# Altium PCB PCB_sim800.PcbDoc
Units mil, origin at the board's own origin, x right, y up, seen from the top; angles counter-clockwise.
Board outline 3385.83 x 2204.72 mil, 2 copper layers (Top Layer, Bottom Layer), stack 61.2 mil thick; 112 components, 1 nets, 371 pads, 55 vias.
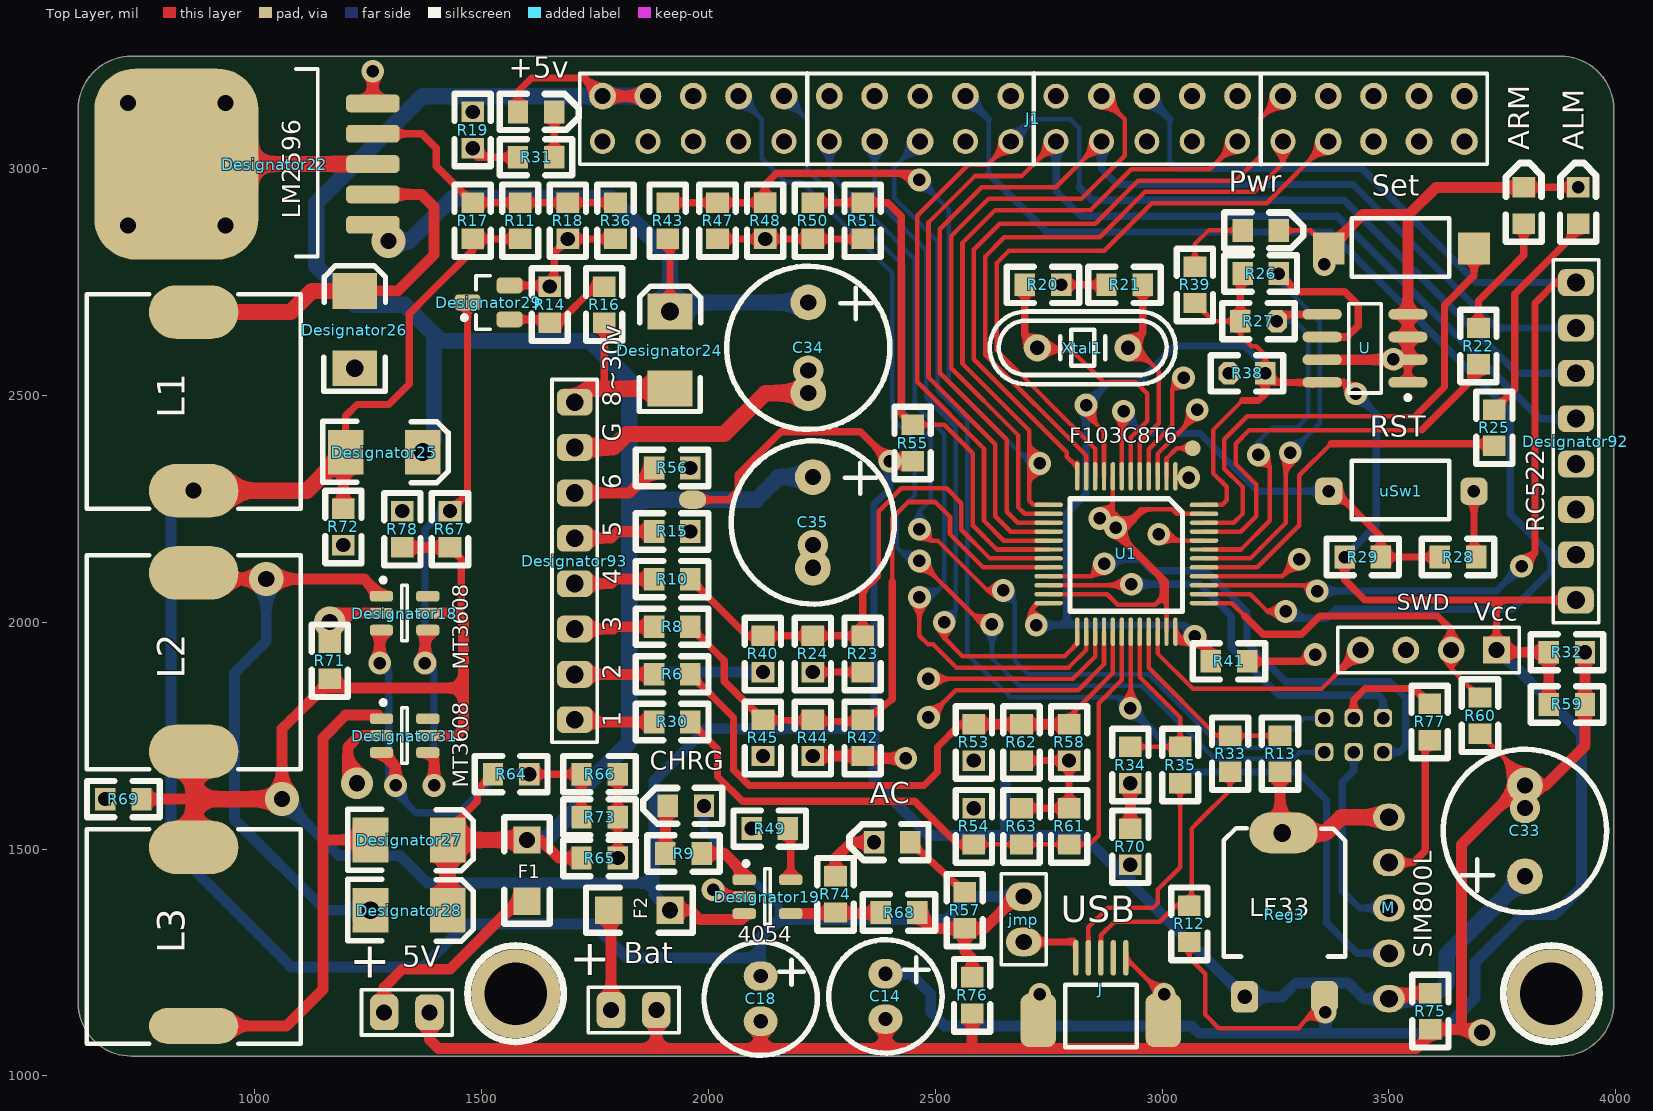
[diagram p0: Top Layer view]
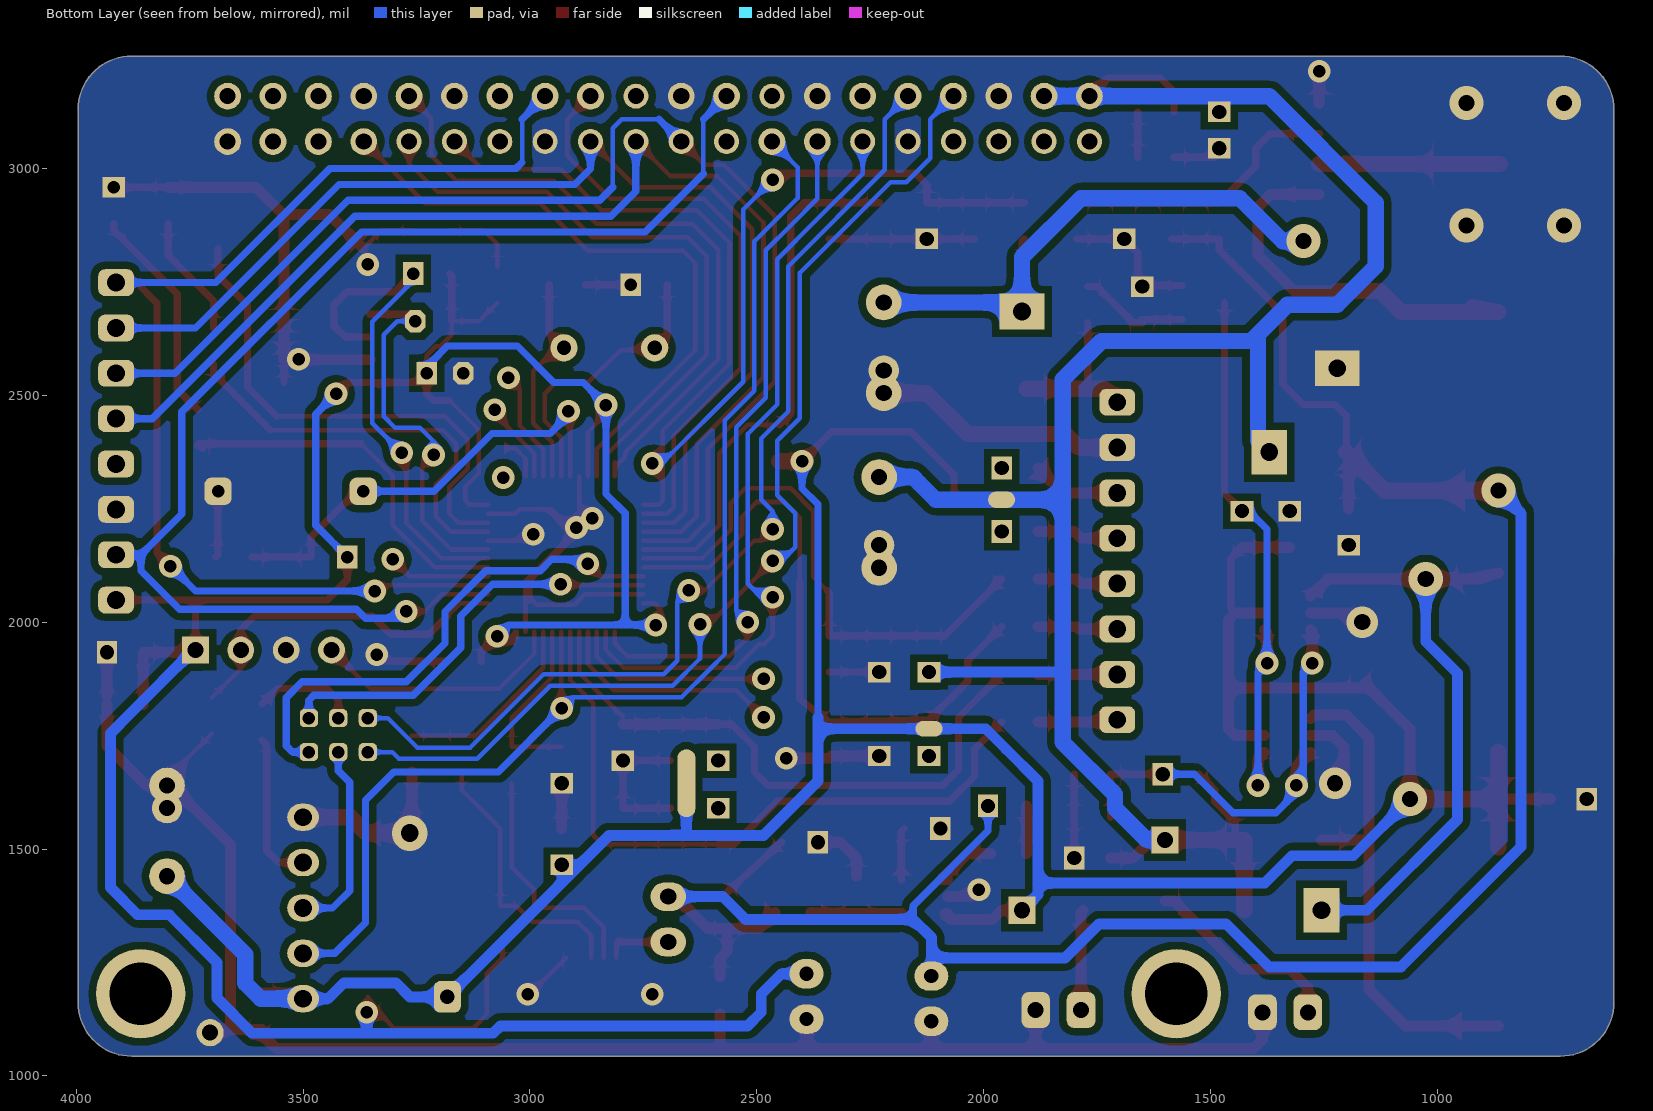
[diagram p1: Bottom Layer view, seen from below]

## Layer stack, top to bottom
Top Solder: solder mask 0.8, Solder Resist, Dk 3.5
Top Layer: signal copper 2.1
Dielectric 1: dielectric 57, FR-4, Dk 4.6
Bottom Layer: signal copper 2.1
Bottom Solder: solder mask 0.8, Solder Resist, Dk 3.5

## Board outline
728.35,1043.31 cw(c728.35,1161.42) 610.24,1161.42 610.24,3129.92 cw(c728.35,3129.92) 728.35,3248.03 3877.95,3248.03 cw(c3877.95,3129.92) 3996.06,3129.92 3996.06,1161.42 cw(c3877.95,1161.42) 3877.95,1043.31

## Design rules (kind name [scope] priority, off if disabled: settings)
Clearance [All] p1: gap=16 except(8: Track-SMDPad Track-Track SMDPad-SMDPad)
PlaneClearance [InNet('GND')] p1: clearance=20
PolygonConnect [All] p1: connectstyle=Direct reliefconductorwidth=20 reliefentries=4 polygonreliefangle="90 Angle" airgapwidth=20
RoutingVias [All] p1: holewidth=28 width=50 viastyle="Through Hole" minholewidth=28 minwidth=50 maxholewidth=28 maxwidth=50
SilkToSolderMaskClearance [IsPad] p1: minsilkscreentomaskgap=0 clearancetoexposedcopper=TRUE
SolderMaskExpansion [All] p1: expansion=4
UnRoutedNet [All] p1 off:
UnpouredPolygon [All] p1 off: allowunpoured=FALSE
Width [All] p1: maxlimit=36 minlimit=10 preferedwidth=10
26 further rules are at their usual default settings.

## Classes and differential pairs
component class "RPI 3": jmp R2

## Components (designator, comment, footprint, x,y, rotation, side; value= is the part's Value field where it differs from the comment)
5V "+" HDR1X2#1 1385,1140 r180 top
+5v "Comment" LED805#1 1580,3125 r0 top
AC "Comment" LED805#2 2445,1515 r180 top
ALM "Comment" LED805#3 3917.4,2878.7 r90 top
ARM "Comment" LED805#1 3797.4,2878.7 r90 top
Bat "+" HDR1X2#1 1885,1145 r180 top
C14 "Comment" CAP_1.0 2390,1175 r270 top
C18 "Comment" CAP_1.0 2115,1170 r270 top
C33 "470uF/50v" Cap_big 3800,1440 r90 top
C34 "470uF/50v" Cap_big 2220,2705 r270 top
C35 "470uF/50v" Cap_big 2230,2320 r270 top
CHRG "Comment" LED805#4 1990,1595 r180 top
Designator18 "MT3608" SOT23-6_M#1 1330,2020 r0 top
Designator19 "4054" SOT23-6_M#2 2130,1395 r0 top
Designator22 "LM2596" D2PAK 1260,3010 r90 top
Designator23 "Comment" Diode_smd_wide#1 880,3335 r0 top
Designator24 "Comment" Diode_smd_wide#2 1915,2515 r0 top
Designator25 "Comment" Diode_smd_wide#2 1200,2375 r270 top
Designator26 "Comment" Diode_smd_wide#3 1220,2560 r0 top
Designator27 "Comment" Diode_smd_wide#4 1255,1520 r270 top
Designator28 "Comment" Diode_smd_wide#3 1255,1365 r270 top
Designator29 "Comment" SOT23_M 1515,2705 r180 top
Designator31 "MT3608" SOT23-6_M#1 1330,1750 r0 top
Designator92 "RC522" HDR1X8#1 3912.4,2048.7 r90 top
Designator93 "RC522" HDR1X8#2 1705,1785 r90 top
F1 "Fuse" 1206 1600,1385 r90 top
F2 "Fuse" 1206 1780,1365 r0 top
J "USB" Micro_USB 2865,1260 r90 top
J1 "RasPi" HDR2X20 1766.4,3059.7 r0 top
jmp "Comment" HDR1X2#2 2695,1295 r90 top
L1 "Comment" L_Power_smd#1 865,2290 r90 top
L2 "Comment" L_Power_smd#1 865,1715 r90 top
L3 "Comment" L_Power_smd#2 865,1110 r90 top
M "SIM800L" SIM800L 3500,1570 r180 top
OUT "Comment" HDR1X3 -310.39,2261.81 r90 top
Pwr "Comment" LED805#1 3177.4,2863.7 r0 top
R6 "Comment" SMD0805#1 1880,1885 r0 top
R8 "Comment" SMD0805#1 1880,1990 r0 top
R9 "Comment" SMD0805#1 1905,1490 r0 top
R10 "Comment" SMD0805#1 1880,2095 r0 top
R11 "Comment" SMD0805#1 1585,2925 r270 top
R12 "Comment" SMD0805#1 3060,1375 r270 top
R13 "Comment" SMD0805#1 3260,1670 r90 top
R14 "Comment" SMD0805#2 1650,2660 r90 top
R15 "Comment" SMD0805#3 1960,2200 r180 top
R16 "Comment" SMD0805#1 1770,2660 r90 top
R17 "Comment" SMD0805#1 1480,2845 r90 top
R18 "Comment" SMD0805#3 1690,2845 r90 top
R19 "Comment" SMD0805#4 1480,3045 r90 top
R20 "Comment" SMD0805#5 2697.4,2743.7 r0 top
R21 "Comment" SMD0805#1 2877.4,2743.7 r0 top
R22 "Comment" SMD0805#1 3697.4,2568.7 r90 top
R23 "Comment" SMD0805#1 2340,1970 r270 top
R24 "Comment" SMD0805#2 2230,1970 r270 top
R25 "Comment" SMD0805#1 3732.4,2388.7 r90 top
R26 "Comment" SMD0805#6 3257.4,2768.7 r180 top
R27 "Comment" SMD0805#7 3252.4,2663.7 r180 top
R28 "Comment" SMD0805#1 3692.4,2143.7 r180 top
R29 "Comment" SMD0805#5 3482.4,2143.7 r180 top
R30 "Comment" SMD0805#1 1960,1780 r180 top
R31 "Comment" SMD0805#1 1580,3025 r0 top
R32 "Comment" SMD0805#2 3852.4,1933.7 r0 top
R33 "Comment" SMD0805#1 3150,1670 r90 top
R34 "Comment" SMD0805#2 2930,1725 r270 top
R35 "Comment" SMD0805#1 3040,1645 r90 top
R36 "Comment" SMD0805#1 1795,2925 r270 top
R38 "Comment" SMD0805#8 3147.4,2548.7 r0 top
R39 "Comment" SMD0805#1 3072.4,2703.7 r90 top
R40 "Comment" SMD0805#2 2120,1970 r270 top
R41 "Comment" SMD0805#1 3107.4,1913.7 r0 top
R42 "Comment" SMD0805#1 2340,1785 r270 top
R43 "Comment" SMD0805#1 1910,2845 r90 top
R44 "Comment" SMD0805#2 2230,1785 r270 top
R45 "Comment" SMD0805#2 2120,1785 r270 top
R47 "Comment" SMD0805#1 2020,2845 r90 top
R48 "Comment" SMD0805#3 2125,2845 r90 top
R49 "Comment" SMD0805#2 2175,1545 r180 top
R50 "Comment" SMD0805#1 2230,2845 r90 top
R51 "Comment" SMD0805#1 2340,2845 r90 top
R53 "Comment" SMD0805#2 2585,1775 r270 top
R54 "Comment" SMD0805#3 2585,1590 r270 top
R55 "Comment" SMD0805#1 2450,2435 r270 top
R56 "Comment" SMD0805#3 1960,2340 r180 top
R57 "Comment" SMD0805#1 2565,1325 r90 top
R58 "Comment" SMD0805#3 2795,1695 r90 top
R59 "Comment" SMD0805#1 3852.4,1818.7 r0 top
R60 "Comment" SMD0805#1 3700.98,1753.98 r90 top
R61 "Comment" SMD0805#1 2795,1510 r90 top
R62 "Comment" SMD0805#1 2690,1695 r90 top
R63 "Comment" SMD0805#1 2690,1510 r90 top
R64 "Comment" SMD0805#2 1525,1665 r0 top
R65 "Comment" SMD0805#3 1800,1480 r180 top
R66 "Comment" SMD0805#1 1800,1665 r180 top
R67 "Comment" SMD0805#3 1430,2245 r270 top
R68 "Comment" SMD0805#1 2460,1360 r180 top
R69 "Comment" SMD0805#3 670,1610 r0 top
R70 "Comment" SMD0805#3 2930,1465 r90 top
R71 "Comment" SMD0805#1 1165,1955 r270 top
R72 "Comment" SMD0805#3 1195,2170 r90 top
R73 "Comment" SMD0805#1 1800,1570 r180 top
R74 "Comment" SMD0805#1 2280,1440 r270 top
R75 "Comment" SMD0805#1 3591.3,1102.4 r90 top
R76 "Comment" SMD0805#1 2581.3,1137.4 r90 top
R77 "Comment" SMD0805#1 3590,1820 r270 top
R78 "Comment" SMD0805#3 1325,2245 r270 top
Reg3 "LF33" DPAK 3270,1545 r0 top
Set "Comment" MicroSW_smd#1 3367.4,2823.7 r0 top
SWD "Comment" HDR1X4 3737.4,1938.7 r180 top
U "24C01" SO8_N 3447.4,2603.7 r180 top
U1 "F103C8T6" STM32F103C8T6_LQFP48 3092.4,2258.7 r180 top
uSw1 "RST" MicroSW_smd#2 3367.4,2288.7 r0 top
Xtal1 "Comment" XTAL2 2875,2665 r180 top

## Footprints (in the part's own frame and the unit in brackets; to place one, negate y for a bottom-side part, rotate by r counter-clockwise, add the part's x,y. Pads: shape width x height; smd on the part's side, far side on the other; paste and mask are expansions set on the pad)
1206 [mil]
  rect 60x60 smd: 1(0,0)
  rect 60x60 hole 35.43: 2(135,0)
  silkscreen extent -50,-50 185,50
CAP_1.0 [mil]
  oval 65x75 hole 31.5: 2(-50,0) 3(50,0)
  silkscreen extent -125,-125 125,125
Cap_big [mm]
  round 2 hole 0.9: 1(5.08,0) 2(0,0)
  silkscreen extent -2.03,-4.57 7.11,4.57
D2PAK [mm]
  rrect50% 10.7x9.2 smd: 2(0,11)
  rrect50% 1x3 smd: En_(3.4,0) FB(1.7,0) Gnd(0,0) In(-3.4,0) Out(-1.7,0)
  silkscreen extent -5.17,3.08 5.33,4.33
Diode_smd_wide#1 [mm]
  rect 2.5x2 smd: 1(-1265.9,-1266.943) 2(-1265.9,-1262.625)
  silkscreen extent -1267.63,-1268.22 -1264.18,-1261.2
Diode_smd_wide#2 [mm]
  rect 2.5x2 smd: 1(0,0)
  rect 2.5x2 hole 1: 2(0,4.318)
  silkscreen extent -1.73,-1.28 1.73,5.74
Diode_smd_wide#3 [mm]
  rect 2.5x2 hole 1: 1(0,0)
  rect 2.5x2 smd: 2(0,4.318)
  silkscreen extent -1.73,-1.28 1.73,5.74
Diode_smd_wide#4 [mm]
  rect 2.5x2 smd: 1(0,0) 2(0,4.318)
  silkscreen extent -1.73,-1.28 1.73,5.74
DPAK [mil]
  oval 150x90 smd: 0(-2.2,-9.65)
  rrect50% 60x70 hole 31.5: In(-88,-371)
  rrect50% 60x70 smd: Out(88,-371)
  silkscreen extent -134,-282 134,1
HDR1X2#1 [mm] "Connector; Header; 2 Position"
  rrect50% 1.6x2 hole 0.9: 1(0,0) 2(2.54,0)
  silkscreen extent -1.27,-1.27 3.81,1.27
HDR1X2#2 [mm] "Connector; Header; 2 Position"
  oval 1.6x2 hole 0.9: 1(0,0) 2(2.54,0)
  silkscreen extent -1.27,-1.27 3.81,1.27
HDR1X3 [mm] "Connector; Header; 3 Position"
  rrect50% 1.5x2.5 hole 1: 1(0,0) 2(2.54,0) 3(5.08,0)
  silkscreen extent -1.27,-1.27 6.35,1.27
HDR1X4 [mm] "Connector; Header; 4 Position"
  round 1.5 hole 0.9: GND(5.08,0) SWCLK(2.54,0) SWDIO(7.62,0)
  rect 1.5x1.5 hole 0.9: VDD(0,0)
  silkscreen extent -1.27,-1.27 8.89,1.27
HDR1X8#1 [mm] "Connector; Header; 8 Position"
  rrect50% 1.5x2 hole 1: CS(17.78,0) Gnd(5.08,0) IRQ(7.62,0) MISO(10.16,0) MOSI(12.7,0) RST(2.54,0) SCK(15.24,0) Vcc3.3V(0,0)
  silkscreen extent -1.27,-1.27 19.05,1.27
HDR1X8#2 [mm] "Connector; Header; 8 Position"
  rrect50% 1.5x2 hole 1: +12V(17.78,0) Gnd(15.24,0) IO(0,0) IO(2.54,0) IO(5.08,0) IO(7.62,0) IO(10.16,0) IO(12.7,0)
  silkscreen extent -1.27,-1.27 19.05,1.27
HDR2X20 [mm] "Connector; Header; 20x2 Position"
  round 1.4 hole 0.9: 3.3v(0,0) 3.3v(20.32,0) Gnd(10.16,0) Gnd(30.48,0) GPIO2-SDA(2.54,0) GPIO3-SCL(5.08,0) GPIO4(7.62,0) GPIO5(35.56,0) GPIO6(38.1,0) GPIO9-MISO(25.4,0) GPIO10-MOSI(22.86,0) GPIO11-SCLK(27.94,0) GPIO17(12.7,0) GPIO23(17.78,2.54) GPIO25(25.4,2.54) ID_SD(33.02,0)
  round 1.5 hole 0.9: 5v(0,2.54) 5v(2.54,2.54) Gnd(5.08,2.54) Gnd(15.24,2.54) Gnd(22.86,2.54) Gnd(35.56,2.54) GND(40.64,2.54) Gnd(48.26,0) GPIO7-CE1(30.48,2.54) GPIO8-CE0(27.94,2.54) GPIO12(38.1,2.54) GPIO13(40.64,0) GPIO14-TX(7.62,2.54) GPIO15-RX(10.16,2.54) GPIO16-CE0(43.18,2.54) GPIO18(12.7,2.54) GPIO19-MISO(43.18,0) GPIO20-MOSI(45.72,2.54) GPIO21-SCLK(48.26,2.54) GPIO22(17.78,0) GPIO24(20.32,2.54) GPIO26(45.72,0) GPIO27(15.24,0) ID_SC(33.02,2.54)
  silkscreen extent -1.27,-1.27 49.53,3.81
L_Power_smd#1 [mm]
  oval 3x5 smd: 0(0,0) 0(10,0)
  silkscreen extent -1,-6 11,6
L_Power_smd#2 [mm]
  oval 2x5 smd: 0(0,0)
  oval 3x5 smd: 0(10,0)
  silkscreen extent -1,-6 11,6
LED805#1 [mil]
  rect 45x50 smd: 0(0,0) 0(80,0)
  silkscreen extent -40,-40 134,40
LED805#2 [mil]
  rect 45x50 smd: 0(0,0)
  rect 45x50 hole 31.5: 0(80,0)
  silkscreen extent -40,-40 134,40
LED805#3 [mil]
  rect 45x50 smd: 0(0,0)
  rect 45x50 hole 27.56: 0(80,0)
  silkscreen extent -40,-40 134,40
LED805#4 [mil]
  rect 45x50 hole 31.5: 0(0,0)
  rect 45x50 smd: 0(80,0)
  silkscreen extent -40,-40 134,40
Micro_USB [mm]
  rrect50% 3x2 smd: 1(-3.5,-3.5) 1(-3.5,3.5)
  oval 2x0.3 smd: D+(0,0) D-(0,0.7) Gnd(0,-1.4) ID(0,-0.7) Vcc(0,1.4)
  silkscreen extent -5,-2 -1.5,2
MicroSW_smd#1 [mil]
  rect 70x70 smd: 1(0,0) 2(320,0)
  silkscreen extent 51,-62 266,67
MicroSW_smd#2 [mil]
  rrect50% 60x60 hole 27.56: 1(0,0) 2(320,0)
  silkscreen extent 51,-62 266,67
SIM800L [mil]
  oval 70x60 hole 39.37: Gnd(0,0) RST(0,300) RXD(0,200) TXD(0,100) Vcc(0,400)
SMD0805#1 [mil]
  rect 45x50 smd: 0(0,0) 0(80,0)
  silkscreen extent -40,-40 120,40
SMD0805#2 [mil]
  rect 45x50 smd: 0(0,0)
  rect 45x50 hole 31.5: 0(80,0)
  silkscreen extent -40,-40 120,40
SMD0805#3 [mil]
  rect 45x50 hole 31.5: 0(0,0)
  rect 45x50 smd: 0(80,0)
  silkscreen extent -40,-40 120,40
SMD0805#4 [mil]
  rect 45x50 hole 31.5: 0(0,0) 0(80,0)
  silkscreen extent -40,-40 120,40
SMD0805#5 [mil]
  rect 45x50 smd: 0(0,0)
  rect 45x50 hole 27.56: 0(80,0)
  silkscreen extent -40,-40 120,40
SMD0805#6 [mil]
  rect 45x50 hole 27.56: 0(0,0)
  rect 45x50 smd: 0(80,0)
  silkscreen extent -40,-40 120,40
SMD0805#7 [mil]
  oct 45x50 hole 27.56: 0(0,0)
  rect 45x50 smd: 0(80,0)
  silkscreen extent -40,-40 120,40
SMD0805#8 [mil]
  oct 45x50 hole 27.56: 0(0,0)
  rect 45x50 hole 27.56: 0(80,0)
  silkscreen extent -40,-40 120,40
SO8_N [mm] "SOIC, 8-Leads, Body 4.9x3.9mm, Pitch 1.27mm, IPC Medium Density"
  oval 2.2x0.6 smd: Gnd(-2.4,1.905) Gnd(-2.4,-0.635) Gnd(-2.4,0.635) Gnd(-2.4,-1.905) Gnd(2.4,0.635) SCL(2.4,-0.635) SDA(2.4,-1.905) Vcc(2.4,1.905)
  silkscreen extent -2.53,-2.5 0.9,2.88, body extent -2,-2.5 2,2.5, height 1.75
SOT23-6_M#1 [mm] "SOT23, 6-Leads, Body 2.9x1.6mm, Pitch 0.95mm, Lead Span 2.7mm, IPC Low Density"
  rrect50% 1.3x0.6 smd: En(1.3,-0.95) FB(-1.3,-0.95) Gnd(-1.3,0) In(1.3,0) NC(1.3,0.95) SW(-1.3,0.95)
  silkscreen extent -1.32,-1.55 0.15,1.97, body extent -0.9,-1.55 0.9,1.55, height 1.45
SOT23-6_M#2 [mm] "SOT23, 6-Leads, Body 2.9x1.6mm, Pitch 0.95mm, Lead Span 2.7mm, IPC Low Density"
  rrect50% 1.3x0.6 smd: Bat(-1.3,-0.95) CHRG(-1.3,0.95) Gnd(-1.3,0) Prog(1.3,0.95) Vcc(1.3,-0.95)
  silkscreen extent -1.32,-1.55 0.15,1.97, body extent -0.9,-1.55 0.9,1.55, height 1.45
SOT23_M [mm] "SOT23, 3-Leads, Body 2.9x1.3mm, Pitch 0.95mm, Lead Span 2.3mm - Reverse Pinning, IPC Low Density"
  rrect50% 1.45x0.9 smd: 1(1.175,0) 2(-1.175,-0.95) 3(-1.175,0.95)
  silkscreen extent -0.1,-1.5 1.47,1.5, body extent -0.7,-1.5 0.7,1.5, height 1.1
STM32F103C8T6_LQFP48 [mm]
  oval 1.6x0.25 smd: BOOT0(0,2) PA3-RX2(8.7,0) PA4-NSS1(8.7,0.5) PA5-SCK1(8.7,1) PA6-MISO1(8.7,1.5) PA7-MOSI1(8.7,2) PA14-JTCK-SWDCLK(0,5.5) PA15-JTDI(0,5) PB0(8.7,2.5) PB1(8.7,3) PB2(8.7,3.5) PB3-TDO(0,4.5) PB4-JTRST(0,4) PB5(0,3.5) PB6-SCL1(0,3) PB7-SDA1(0,2.5) PB8(0,1.5) PB9(0,1) PB10-TX3-SCL2(8.7,4) PB11-RX3-SDA2(8.7,4.5) VDD_1(8.7,5.5) VDD_3(0,0) VSS_1(8.7,5) VSS_3(0,0.5)
  oval 0.25x1.6 smd: NRST(4.6,-1.6) PA0-WKUP(6.1,-1.6) PA1(6.6,-1.6) PA2-TX2(7.1,-1.6) PA8(5.1,7.1) PA9-TX1-FT(4.6,7.1) PA10-RX1-FT(4.1,7.1) PA11-UsbDM(3.6,7.1) PA12-UsbDP(3.1,7.1) PA13-TMS-SWDIO(2.6,7.1) PB12-NSS2(7.1,7.1) PB13-SCK2(6.6,7.1) PB14-MISO2(6.1,7.1) PB15-MOSI2(5.6,7.1) Pc13-Tamper-RTC(2.1,-1.6) PC14-OSC32_IN(2.6,-1.6) PC15-OSC32_OUT(3.1,-1.6) PD0-OSC_IN(3.6,-1.6) PD1-OSC_OUT(4.1,-1.6) VBAT(1.6,-1.6) VDD_2(1.6,7.1) VDDA(5.6,-1.6) VSS_2(2.1,7.1) VSSA(5.1,-1.6)
  silkscreen extent 1.2,-0.35 7.5,5.95
XTAL2 [mil]
  round 60 hole 31.5: 1(-50,60) 2(150,60)
  silkscreen extent -155,-20 255,140

## Part data
OUT: library part "Header 3"

## Free pads (board coordinates)
  oval 60x40 smd: 0(1965,2270)
  round 35 smd: 0(3067.4,2383.7)
  rrect50% 40x40 hole 27.56: 0(3357.4,1713.7) 0(3357.4,1788.7) 0(3422.4,1713.7) 0(3422.4,1788.7) 0(3487.4,1713.7) 0(3487.4,1788.7)
  round 60 hole 35.43: 0(3705,1095)
  oval 60x36 smd far side: 1(1960,2270)
  round 66.93 hole 35.43: 1(2230,2170) 2(2220,2555) 3(3800,1590)
  oval 60x35 smd far side: 2(2120,1765)
  oval 40x150 smd far side: 3(2655,1645)
  round 196.85 hole 137.8: ""(1574.8,1181.1) ""(3858.27,1181.1)

## Via types
v1: diameter 50, hole 27.56, Top Layer to Bottom Layer, 44 vias
v2: diameter 75, hole 35.43, Top Layer to Bottom Layer, 8 vias
v3: diameter 70, hole 35.43, Top Layer to Bottom Layer, 2 vias
v4: diameter 78.74, hole 39.37, Top Layer to Bottom Layer, 1 vias

## Nets (pads, with @x,y where several pads share a name; then routed paths per layer and width w, separated by ;. In a path a pad name is that pad's centre, name@x,y a point inside that pad or via, vN(x,y) a via of type N, cw(c..) or ccw(c..) an arc to the next point about the centre after c; other vN are vias at no path point)
GND: 5V.1 AC.0@2365,1515 ALM.0@3917.4,2958.7 Bat.1 C14.3 C18.3 C33.1 C34.1 C35.1 Designator26.1 Designator92.Gnd Designator93.Gnd J1.Gnd J1.GND M.Gnd pad.0@3705,1095 pad.1@2230,2170 pad.2@2220,2555 pad.3@3800,1590 R14.0@1650,2740 R18.0@1690,2845 R19.0@1480,3045 R20.0@2777.4,2743.7 R21.0@2877.4,2743.7 R24.0@2230,1890 R32.0@3932.4,1933.7 R34.0@2930,1645 R38.0@3147.4,2548.7 R44.0@2230,1705 R48.0@2125,2845 R49.0@2095,1545 R58.0@2795,1695 R65.0@1800,1480 R69.0@670,1610 R71.0@1165,1955 R72.0@1195,2170 R78.0@1325,2245 SWD.GND uSw1.2 | length 290
  Top Layer w16: R20.0@2792.4,2743.7 R21.0@2877.4,2743.7 ; 2795,1590 R58.0@2795,1695
  Top Layer w24: 2930,1545 R34.0@2930,1645
  other v1: 2730,1180 3005,1180 2010,1410 2435,1700 3337.4,1928.7 2992.4,2193.7 2897.4,2208.7 2862.4,2228.7 3510,2580 3357.4,2788.7 1260,3215
  other v2: 720,2875 935,2875 720,3145 935,3145
  other v3: 1225,1645 1165,2000
  other v4: 3265,1535
pads on no net: 5V.2 +5v.0 AC.0@2445,1515 ALM.0@3917.4,2878.7 ARM.0 Bat.2 C14.2 C18.2 C33.2 C34.2 C35.2 CHRG.0 Designator18.En Designator18.FB Designator18.Gnd Designator18.In Designator18.NC Designator18.SW Designator19.Bat Designator19.CHRG Designator19.Gnd Designator19.Prog Designator19.Vcc Designator22.2 Designator22.En_ Designator22.FB Designator22.Gnd Designator22.In Designator22.Out Designator23.1 Designator23.2 Designator24.1 Designator24.2 Designator25.1 Designator25.2 Designator26.2 Designator27.1 Designator27.2 Designator28.1 Designator28.2 Designator29.1 Designator29.2 Designator29.3 Designator31.En Designator31.FB Designator31.Gnd Designator31.In Designator31.NC Designator31.SW Designator92.CS Designator92.IRQ Designator92.MISO Designator92.MOSI Designator92.RST Designator92.SCK Designator92.Vcc3.3V Designator93.+12V Designator93.IO F1.1 F1.2 F2.1 F2.2 J1.3.3v J1.5v J1.GPIO2-SDA J1.GPIO3-SCL J1.GPIO4 J1.GPIO5 J1.GPIO6 J1.GPIO7-CE1 J1.GPIO8-CE0 J1.GPIO9-MISO J1.GPIO10-MOSI J1.GPIO11-SCLK J1.GPIO12 J1.GPIO13 J1.GPIO14-TX J1.GPIO15-RX J1.GPIO16-CE0 J1.GPIO17 J1.GPIO18 J1.GPIO19-MISO J1.GPIO20-MOSI J1.GPIO21-SCLK J1.GPIO22 J1.GPIO23 J1.GPIO24 J1.GPIO25 J1.GPIO26 J1.GPIO27 J1.ID_SC J1.ID_SD J.1 J.D+ J.D- J.Gnd J.ID J.Vcc jmp.1 jmp.2 L1.0 L2.0 L3.0 M.RST M.RXD M.TXD M.Vcc OUT.1 OUT.2 OUT.3 Pwr.0 R6.0 R8.0 R9.0 R10.0 R11.0 R12.0 R13.0 R14.0@1650,2660 R15.0 R16.0 R17.0 R18.0@1690,2925 R19.0@1480,3125 R20.0@2697.4,2743.7 R21.0@2957.4,2743.7 R22.0 R23.0 R24.0@2230,1970 R25.0 R26.0 R27.0 R28.0 R29.0 R30.0 R31.0 R32.0@3852.4,1933.7 R33.0 R34.0@2930,1725 R35.0 R36.0 R38.0@3227.4,2548.7 R39.0 R40.0 R41.0 R42.0 R43.0 R44.0@2230,1785 R45.0 R47.0 R48.0@2125,2925 R49.0@2175,1545 R50.0 R51.0 R53.0 R54.0 R55.0 R56.0 R57.0 R58.0@2795,1775 R59.0 R60.0 R61.0 R62.0 R63.0 R64.0 R65.0@1720,1480 R66.0 R67.0 R68.0 R69.0@750,1610 R70.0 R71.0@1165,1875 R72.0@1195,2250 R73.0 R74.0 R75.0 R76.0 R77.0 R78.0@1325,2165 Reg3.0 Reg3.In Reg3.Out Set.1 Set.2 SWD.SWCLK SWD.SWDIO SWD.VDD U1.BOOT0 U1.NRST U1.PA0-WKUP U1.PA1 U1.PA2-TX2 U1.PA3-RX2 U1.PA4-NSS1 U1.PA5-SCK1 U1.PA6-MISO1 U1.PA7-MOSI1 U1.PA8 U1.PA9-TX1-FT U1.PA10-RX1-FT U1.PA11-UsbDM U1.PA12-UsbDP U1.PA13-TMS-SWDIO U1.PA14-JTCK-SWDCLK U1.PA15-JTDI U1.PB0 U1.PB1 U1.PB2 U1.PB3-TDO U1.PB4-JTRST U1.PB5 U1.PB6-SCL1 U1.PB7-SDA1 U1.PB8 U1.PB9 U1.PB10-TX3-SCL2 U1.PB11-RX3-SDA2 U1.PB12-NSS2 U1.PB13-SCK2 U1.PB14-MISO2 U1.PB15-MOSI2 U1.Pc13-Tamper-RTC U1.PC14-OSC32_IN U1.PC15-OSC32_OUT U1.PD0-OSC_IN U1.PD1-OSC_OUT U1.VBAT U1.VDD_1 U1.VDD_2 U1.VDD_3 U1.VDDA U1.VSS_1 U1.VSS_2 U1.VSS_3 U1.VSSA U.Gnd U.SCL U.SDA U.Vcc uSw1.1 Xtal1.1 Xtal1.2
copper on no net: | length 101071.1
  Top Layer w10: 2345,2070 2375,2100 2375,2245 2425,2295 2525,2295 2557.4,2262.6 2557.4,2203.7 2620.51,2140.59 2749.88,2140.59 ; 2405,2090 2405,2230 2440,2265 2500,2265 2532.4,2232.6 2532.4,2193.7 2605.2,2120.91 2749.88,2120.91 ; 2435,2450 2450,2435 2520,2435 2582.4,2372.6 2582.4,2213.7 2635.83,2160.28 2749.88,2160.28 ; v1(2465,2055) 2465,1970 2483.9,1951.1 2495,1951.1 2546.1,1900 2793.7,1900 2832.56,1938.86 2832.56,1979.17 ; v1(2465,2135) 2575,2025 2605,1995 v1(2625,1995) ; v1@2475,2205 v1(2465,2205) 2490,2180 2505,2180 2615,2070 v1(2650,2070) ; v1(2485,1790) 2545,1850 2815,1850 2871.93,1906.93 2871.93,1979.17 ; v1(2485,1875) 2530,1875 2740,1875 2803.7,1875 2852.24,1923.54 2852.24,1979.17 ; v1(2520,2000) 2520,1965 2525,1960 2560,1925 2785,1925 2812.87,1952.87 2812.87,1979.17 ; 2585,1510 2795,1510 2840,1510 2860,1530 2860,1821.3 2911.3,1872.6 ; 2666.4,3059.7 2615.4,3008.7 2572.4,3008.7 2460,2896.3 2460,2530 2607.4,2382.6 2607.4,2223.7 2651.14,2179.96 2749.88,2179.96 ; 2705,2625 2725,2605 2730,2600 2800,2600 2871.3,2528.7 2942.4,2528.7 2967.4,2503.7 2967.4,2443.7 2930.98,2407.28 2930.98,2321.69 ; v1(2722.4,1993.7) 2712.4,2003.7 2712.4,2028.7 2725.87,2042.17 2749.88,2042.17 ; 2749.88,2061.85 2879.25,2061.85 2902.4,2038.7 2984.72,2038.7 3009.72,2063.7 ; 2749.88,2081.54 2930.24,2081.54 v1(2932.4,2083.7) ; 2749.88,2101.22 2844.92,2101.22 v1(2872.4,2128.7) ; 2749.88,2199.65 2666.46,2199.65 2632.4,2233.7 2632.4,2392.6 2485,2540 2485,2881.3 2587.4,2983.7 2690.4,2983.7 2766.4,3059.7 ; 2749.88,2219.33 2681.77,2219.33 2657.4,2243.7 2657.4,2402.6 2510,2550 2510,2866.3 2602.4,2958.7 2765.4,2958.7 ; 2749.88,2239.02 2697.09,2239.02 2682.4,2253.7 2682.4,2412.6 2535,2560 2535,2851.3 2617.4,2933.7 2822.4,2933.7 2917.4,3028.7 2917.4,3108.7 2866.4,3159.7 ; 2749.88,2258.7 2716.3,2258.7 2707.4,2267.6 2707.4,2422.6 2560,2570 2560,2836.3 2632.4,2908.7 2842.4,2908.7 2932.4,2998.7 3105.4,2998.7 3166.4,3059.7 ; 2760,2958.7 2765.4,2958.7 ; 2795,1791.3 2828.7,1825 2837.4,1833.7 2891.61,1887.91 2891.61,1922.91 2891.61,1979.17 ; 2812.87,2352.13 2812.87,2321.69 2812.87,2342.13 2790,2365 2790,2375 2585,2580 2585,2821.3 2642.4,2878.7 2852.4,2878.7 2947.4,2973.7 3162.4,2973.7 3217.4,3028.7 3217.4,3110.7 3266.4,3159.7 ; v1(2832.4,2478.7) 2832.4,2458.7 2871.93,2419.17 2871.93,2321.69 ; 2832.56,2321.69 2832.56,2367.44 2610,2590 2610,2806.3 2652.4,2848.7 2862.4,2848.7 2962.4,2948.7 3192.4,2948.7 3203.7,2948.7 3266.4,3011.4 3266.4,3059.7 ; 2837.44,1260 2837.44,1327.44 2880,1370 2960,1370 2980,1370 2990,1380 2990,1410 3040,1460 3040,1645 ; 2852.24,2321.69 2852.24,2382.76 2635,2600 2635,2791.3 2662.4,2818.7 2872.4,2818.7 2977.4,2923.7 3230.4,2923.7 3366.4,3059.7 ; 2865,1260 2865,1310 2895,1340 2995,1340 3030,1375 3065,1375 3065,1545 3080,1560 3150,1630 3150,1670 ; 2866.4,3059.7 2765.4,2958.7 ; 2872.4,2238.7 2872.4,2239.49 2891.61,2258.7 2891.61,2244.49 ; 2887.4,1848.7 2911.3,1872.6 ; 2891.61,2321.69 2891.61,2244.49 ; 2892.4,2198.7 3009.72,2081.38 3009.72,2063.7 ; 2911.3,1979.17 2911.3,1917.6 2911.3,1872.6 ; 2911.3,2321.69 2911.3,2457.6 v1@2912.4,2458.7 ; 2912.4,2208.7 2952.4,2248.7 2962.4,2248.7 ; 2917.4,2208.7 2917.4,2183.7 2927.4,2173.7 ; 2920.12,1260 3000.12,1180 3005,1180 ; 2925,2605 2941.1,2605 2992.4,2553.7 2992.4,2438.7 2950.67,2396.97 2950.67,2321.69 ; 2930,1725 3040,1725 3040,1790 2950.67,1879.33 2950.67,1979.17 ; v1(2930,1810) 2930.98,1810.98 2930.98,1855.98 2930.98,1875.12 2930.98,1897.28 2930.98,1979.17 ; 2935,2600 2946.1,2600 ; 2970.35,1979.17 2970.35,1899.65 3120,1750 3150,1750 3260,1750 ; 2970.35,2321.69 2970.35,2381.65 3022.4,2433.7 3022.4,2513.7 v1(3047.4,2538.7) ; 2990.04,1979.17 2990.04,1931.06 3067.4,1853.7 3352.4,1853.7 3397.4,1898.7 ; 2990.04,2321.69 2990.04,2371.34 3067.4,2448.7 v1@3067.4,2473.7 ; 2992.4,2193.7 3006.14,2179.96 3092.4,2179.96 ; 2994.72,2048.7 3009.72,2048.7 ; 2999.72,2053.7 2999.72,2096.38 2997.4,2098.7 3009.72,2086.38 3009.72,2063.7 ; 3009.72,1979.17 3009.72,2091.38 2897.4,2203.7 2897.4,2208.7 ; 3009.72,2321.69 3009.72,2361.02 3032.4,2383.7 3052.4,2383.7 ; 3060,1295 3060,1260 3095,1225 3095,1135 3125,1105 3301.32,1105 3358,1174 ; 3072.4,2703.7 3112.4,2663.7 3172.4,2663.7 3172.4,2633.7 3197.4,2608.7 3207.4,2608.7 3227.4,2588.7 3227.4,2548.7 ; 3072.4,2783.7 3072.4,2833.7 3102.4,2863.7 3177.4,2863.7 ; 3092.4,2042.17 3153.94,2042.17 3182.4,2013.7 ; 3092.4,2061.85 3194.25,2061.85 3232.4,2023.7 ; 3092.4,2081.54 3314.57,2081.54 v1@3327.4,2068.7 ; 3092.4,2101.22 3264.92,2101.22 v1(3302.4,2138.7) ; 3092.4,2120.91 3209.61,2120.91 3302.4,2213.7 3302.4,2323.7 3372.4,2393.7 ; 3092.4,2140.59 3194.29,2140.59 3272.4,2218.7 3272.4,2363.7 v1(3282.4,2373.7) ; 3092.4,2160.28 3173.98,2160.28 3237.4,2223.7 3237.4,2343.7 v1(3212.4,2368.7) ; 3092.4,2199.65 3173.35,2199.65 3207.4,2233.7 3207.4,2303.7 3162.4,2348.7 3162.4,2393.7 3192.4,2423.7 3572.4,2423.7 ; 3092.4,2219.33 3158.03,2219.33 3177.4,2238.7 3177.4,2298.7 3137.4,2338.7 3137.4,2403.7 3187.4,2453.7 3557.4,2453.7 ; 3092.4,2239.02 3032.09,2239.02 3022.4,2248.7 2962.4,2248.7 ; 3092.4,2258.7 3132.4,2258.7 3142.4,2268.7 3142.4,2298.7 3112.4,2328.7 3112.4,2423.7 3177.4,2488.7 ; 3257.4,2863.7 3327.4,2863.7 3367.4,2823.7 ; 3637.4,1938.7 3637.4,1897.56 3700.98,1833.98 ; 3700.98,1753.98 3800,1654.96 3800,1640 ; 2891.61,2244.49 2875.83,2228.7 2862.4,2228.7 2887.4,2228.7 2891.61,2232.91 2891.61,2244.49 ; 2891.61,2244.49 2897.4,2238.7 2897.4,2208.7 ; 2897.4,2208.7 2922.4,2208.7 2962.4,2248.7 ; 2795,1300 2805,1300 2809.88,1295.12 2809.88,1260 2809.88,1285.12 2795,1300 ; 3029.41,1966.69 3029.41,1979.17 3048.39,1960.2 3063.9,1960.2 v1(3072.4,1968.7) 3057.4,1953.7 3042.4,1953.7 3029.41,1966.69
  Top Layer w12: 3232.4,2023.7 v1(3272.4,2023.7)
  Top Layer w16: 1200,2375 1200,2455 1225,2480 1295,2480 1340,2525 1340,2680 1385,2725 1480,2820 1480,2845 1585,2845 ; 1260,3076.93 1368.07,3076.93 1400,3045 1400,3005 1480,2925 1795,2925 ; 1430,2165 1455,2140 1455,2030 1445,2020 ; 1430,2245 1468.74,2283.74 1468.74,2298.74 1468.74,2705 ; 1445,1540 1445,1560 1490,1605 1490,1630 1525,1665 ; 1480,3035 1490,3025 1580,3025 ; 1561.26,2667.6 1652.4,2667.6 ; 1561.26,2742.4 1657.6,2742.4 1660,2740 1660,2815 1690,2845 1795,2845 ; 1580,3125 1580,3170 1610,3200 1726.1,3200 1766.4,3159.7 ; 1605,1665 1720,1665 1720,1570 ; 1650,2660 1670,2660 1750,2740 1770,2740 ; 1660,3025 1660,3125 ; 1770,2515 1770,2660 ; 1800,1490 1800,1665 1800,1560 ; 1910,2845 1915,2840 1915,2685 ; 1910,2925 2125,2925 ; 1960,1780 2020,1720 2020,1660 2075,1605 2455,1605 2500,1560 2550,1510 2585,1510 ; 1960,1885 2055,1790 2055,1675 2090,1640 2450,1640 2475,1640 2505,1670 2505,1705 2505,1725 2555,1775 2585,1775 ; 1960,1990 2020,1930 2035,1915 2035,1870 2120,1785 2340,1780 2405,1830 2405,2090 ; 1965,2270 2045,2270 2065,2290 2065,2325 2160,2420 2335,2420 v1(2400,2355) ; 1970,2095 1960,2095 2055,2000 2085,1970 2120,1970 2160,1970 2340,1970 2340,2065 2345,2070 ; 2020,2845 2125,2845 ; 2120,2845 2230,2845 2340,2845 ; 2120.89,2925.89 2125,2925 ; 2175,1545 2181.18,1538.82 2181.18,1432.4 ; 2230,1890 2340,1890 ; 2230,2925 2340,2925 2395,2925 2425,2895 2425,2460 2450,2435 ; 2335,1705 2340,1700 ; 2445,1515 2565,1405 ; v1(2465,2975) 2450,2990 2185,2990 2150,2990 2125,2965 2125,2925 ; 2690,1590 2795,1590 ; 2690,1695 2795,1695 ; 2695,1295 2800,1295 ; 2697.4,2743.7 2697.4,2632.6 2705,2625 ; 2925,2605 2957.4,2637.4 2957.4,2703.7 2957.4,2743.7 ; v1(3072.4,1968.7) 3107.4,1933.7 3107.4,1913.7 ; 3172.4,2663.7 3172.4,2763.7 3177.4,2768.7 ; 3177.4,2488.7 3212.4,2488.7 3227.4,2503.7 3227.4,2548.7 3247.4,2528.7 3352.91,2528.7 ; 3182.4,2013.7 3222.4,1973.7 3307.4,1973.7 3347.4,2013.7 3607.4,2013.7 3637.4,1983.7 3637.4,1938.7 ; 3187.4,1913.7 3307.4,1913.7 3337.4,1928.7 ; 3252.4,2663.7 3267.4,2678.7 3352.91,2678.7 ; 3257.4,2768.7 3297.4,2728.7 3402.4,2728.7 3432.4,2698.7 3432.4,2653.7 3407.4,2628.7 3352.91,2628.7 ; 3332.91,2523.7 3352.91,2528.7 ; 3352.91,2578.7 3526.89,2578.7 ; 3367.4,2288.7 3382.4,2288.7 3482.4,2188.7 3482.4,2143.7 3612.4,2143.7 ; 3372.4,2393.7 3730.43,2393.7 3719.77,2383.04 3732.4,2388.7 ; 3397.4,1898.7 3437.4,1938.7 ; 3402.4,2143.7 3402.4,2093.7 3447.4,2048.7 3912.4,2048.7 ; 3422.4,1788.7 3422.4,1828.7 3447.4,1853.7 3556.3,1853.7 3590,1820 ; v1(3427.4,2503.7) 3402.4,2528.7 3352.91,2528.7 ; 3500,1470 3553.7,1470 3580,1496.3 3580,1611.3 3580,1710 3580,1730 3590,1740 ; 3537.4,2678.7 3541.89,2678.7 3541.89,2528.7 ; 3557.4,2453.7 3622.4,2518.7 3622.4,2698.7 3687.4,2763.7 3687.4,2823.7 ; 3572.4,2423.7 3697.4,2548.7 3697.4,2568.7 ; 3687.4,2288.7 3687.4,2148.7 3692.4,2143.7 ; 3697.4,2648.7 3697.4,2708.7 3757.4,2768.7 3797.4,2808.7 3797.4,2878.7 ; 3732.4,2468.7 3777.4,2513.7 3777.4,2723.7 3917.4,2863.7 3917.4,2878.7 ; 3737.4,1938.7 3737.4,2048.7 ; v1(3792.4,2123.7) 3822.4,2153.7 3822.4,2703.7 3867.4,2748.7 3912.4,2748.7 ; 3797.4,2958.7 3917.4,2958.7
  Top Layer w24: 750,1610 864.35,1610 865,1609.35 ; 865,1110 1070,1110 1150,1190 1150,1535 1150,1745 1200,1795 1271.22,1795 1278.82,1787.4 ; v2(865,2290) v2@881.76,2290 ; 946.3,2093.7 865,2108.7 906.3,2095 1241.22,2095 1278.82,2057.4 ; v2(1060,1610) 1060,1765 1080,1785 1150,1855 1460,1855 ; 1160,1520 1255,1520 ; 1165,2000 1185,2020 1220,2020 1278.82,2020 ; 1195,2250 1195,2370 1200,2375 ; 1220,2730 1315,2730 1395,2810 1395,2915 1366.93,2943.07 1260,2943.07 ; 1225,1645 1205,1665 1205,1725 1230,1750 1278.82,1750 ; 1260,3143.86 1260,3215 ; v1(1275,1910) 1275,1978.78 1278.82,1982.6 ; 1278.82,1712.6 1310,1681.42 v1(1310,1640) ; 1285,1140 1285,1195 1325,1235 1430,1235 1580,1385 1600,1385 ; 1325,2165 1430,2165 ; v1(1375,1910) 1375,1976.42 1381.18,1982.6 ; 1381.18,1712.6 1395,1698.78 v1(1395,1640) ; 1381.18,1750 1445,1750 1460,1765 1460,2005 1445,2020 1381.18,2020 ; 1385,1140 1385,1080 1405,1060 3560,1060 3591.3,1091.3 ; 1600,1520 1630,1520 1670,1480 1720,1480 ; 1705,1785 1710,1780 1880,1780 ; 1705,1885 1880,1885 ; 1705,1985 1790,1985 1795,1990 1880,1990 ; 1705,2085 1785,2085 1795,2095 1880,2095 ; 1705,2185 1785,2185 1800,2200 1880,2200 ; 1705,2285 1765,2285 ; 1755,2285 1825,2285 1880,2340 ; 1766.4,3159.7 1866.4,3159.7 ; 1780,1365 1785,1360 1785,1145 ; 1885,1060 1885,1145 ; 1905,1490 1905,1595 ; 1930,1350 1915,1365 1960,1365 1980,1345 2072.48,1345 2085.08,1357.6 2078.82,1357.6 ; 1985,1490 2035,1490 2092.6,1432.4 2078.82,1432.4 ; 2010,1410 2025,1395 2078.82,1395 ; 2115,1060 2115,1120 ; 2181.18,1357.6 2302.6,1357.6 2380,1360 ; 2230,1705 2335,1705 ; 2280,1440 2280,1480 2315,1515 2365,1515 ; 2340,1700 2435,1700 ; 2390,1060 2390,1125 ; 2460,1360 2495,1325 2565,1325 ; 2560,1325 2565,1325 ; 2581.3,1137.4 2581.3,1063.7 2585,1060 ; 2581.3,1217.4 2581.3,1258.7 2565,1275 2565,1325 ; 2585,1775 2795,1775 ; 2695,1395 2678.24,1395 2608.24,1325 2565,1325 ; 3260,1670 3260,1543.15 3267.8,1535.35 ; 3352.91,2578.7 3541.89,2578.7 3541.89,2898.19 3542.4,2898.7 ; 3367.4,2823.7 3442.4,2898.7 3543.7,2898.7 3603.7,2958.7 3797.4,2958.7 ; 3500,1170 3512.4,1182.4 3591.3,1182.4 ; 3591.3,1102.4 3697.6,1102.4 3705,1095 ; 3660,1105 3660,1165 ; 3660,1160 3660,1510 3790,1640 3800,1640 3845,1640 3932.4,1727.4 3932.4,1818.7 ; 3737.4,1938.7 3742.4,1933.7 3852.4,1933.7 3852.4,1818.7 ; 3932.4,1838.7 3932.4,1933.7
  Top Layer w36: 861.93,3010 1260,3010 ; 864.35,1610 v2(1060,1610) ; 865,1503.7 865,1715 ; v2(865,2290) 1105,2290 1115,2290 1200,2375 ; 921.3,2695 865,2683.7 1078.7,2683.7 1125,2730 1220,2730 ; 1425,1365 1425,1520 1600,1520 ; 1705,2385 1790,2385 1820,2415 2035,2415 2125,2505 2220,2505 ; 1705,2485 1735,2515 1905,2515 ; v1(2400,2355) 2450,2355 ; 3267.8,1535.35 3360.35,1535.35 3395,1570 3500,1570
  Bottom Layer w10: 2066.4,3159.7 2117.4,3108.7 2117.4,3022.6 2170,2970 2205,2970 2290,2885 2405,2770 2405,2450 2455,2400 2455,2280 2415,2240 2415,2165 2445,2135 v1(2465,2135) ; 2166.4,3159.7 2217.4,3108.7 2217.4,3022.6 2217.4,2997.6 2430,2785 2430,2465 2490,2405 2490,2270 2465,2245 v1(2465,2205) ; 2266.4,3059.7 2266.4,2988.6 2370.6,2884.4 2455,2800 2455,2480 2520,2415 2520,2120 2520,2085 2490,2055 v1(2465,2055) ; 2366.4,3059.7 2366.4,3008.6 2366.4,2933.6 2425.6,2874.4 2480,2820 2480,2495 2545,2430 2545,2100 2545,2025 v1(2520,2000) ; v1(2465,2975) 2505,2935 2530,2910 2530,2530 2710,2350 v1(2730,2350) ; 2466.4,3059.7 2410,3003.3 2410,2935 2505,2840 2505,2566.4 2505,2510 2570,2445 2570,2080 2570,1930 2603.7,1896.3 2665,1835 2905,1835 v1(2930,1810) ; 2617.4,2988.7 2617.4,3108.7 ; v1(2625,1995) 2625,1920 2685,1860 2955,1860 3116.3,1698.7 3288.7,1698.7 3303.7,1713.7 3357.4,1713.7 ; v1(2650,2070) 2675,2045 2675,1915 2705,1885 2970,1885 3131.3,1723.7 3248.7,1723.7 3313.7,1788.7 3357.4,1788.7 ; 2715.4,3108.7 2797.4,3108.7 2817.4,3088.7 2817.4,2958.7 ; 3017.4,3013.7 3017.4,3108.7 ; v1(3212.4,2368.7) 3212.4,2398.7 3242.4,2428.7 3297.4,2428.7 3322.4,2453.7 3322.4,2633.7 3292.4,2663.7 3252.4,2663.7 ; 3257.4,2768.7 3262.4,2763.7 3262.4,2747.6 3347.4,2662.6 3347.4,2438.7 v1(3282.4,2373.7)
  Bottom Layer w16: v1(1275,1910) 1295,1890 1295,1655 v1(1310,1640) 1310,1625 1355,1580 1450,1580 1535,1665 1605,1665 ; v1(1395,1640) 1395,1890 v1(1375,1910) 1375,2205 1415,2245 1430,2245 ; 1990,1565 1990,1595 1990,1540 2155,1375 2155,1345 ; 2365,1765 2365,2260 2400,2295 v1(2400,2355) ; 2566.4,3159.7 2617.4,3108.7 ; 2617.4,2988.7 2746.1,2860 3371.1,2860 3767.4,2463.7 3767.4,2238.7 3857.4,2148.7 ; 2666.4,3059.7 2715.4,3108.7 ; v1(2722.4,1993.7) 3047.4,1993.7 v1(3072.4,1968.7) ; 2766.4,3059.7 2766.4,2949.7 2821.1,2895 3386.1,2895 3832.4,2448.7 3912.4,2448.7 ; 2790,1993.7 2790,2240 2832.4,2282.4 v1(2832.4,2478.7) 2882.4,2528.7 2947.4,2528.7 3027.4,2608.7 3182.4,2608.7 3227.4,2563.7 ; 2817.4,2958.7 2846.1,2930 3401.1,2930 3782.4,2548.7 3912.4,2548.7 ; 2866.4,3059.7 2866.4,2999.7 2901.1,2965 3421.1,2965 3737.4,2648.7 3912.4,2648.7 ; v1(2872.4,2128.7) 2882.4,2138.7 2952.4,2138.7 2977.4,2113.7 3097.4,2113.7 3187.4,2023.7 3187.4,1953.7 3272.4,1868.7 3452.4,1868.7 3502.4,1868.7 3537.4,1833.7 3537.4,1753.7 3537.4,1727.4 3523.7,1713.7 3487.4,1713.7 ; v1@2912.4,2458.7 2954.9,2416.2 2997.19,2416.2 3083.8,2416.2 3211.3,2288.7 3367.4,2288.7 ; v1(2930,1810) 3070,1670 3111.1,1670 3300,1670 3362.4,1607.6 3362.4,1372.6 3362.4,1337.6 3430,1270 3500,1270 ; v1(2932.4,2083.7) 3082.4,2083.7 3152.4,2013.7 3152.4,1943.7 3257.4,1838.7 3402.4,1838.7 3457.4,1838.7 3476.3,1838.7 3487.4,1827.6 3487.4,1788.7 ; 2966.4,3159.7 3017.4,3108.7 ; 3017.4,3013.7 3031.1,3000 3441.1,3000 3692.4,2748.7 3912.4,2748.7 ; v1@3282.4,2023.7 3283.6,2015.3 3292.4,2008.7 3362.4,2008.7 3382.4,2028.7 3772.4,2028.7 3857.4,2113.7 3857.4,2148.7 ; v1@3327.4,2068.7 3737.4,2068.7 v1(3792.4,2123.7) ; 3402.4,2143.7 3472.4,2213.7 3472.4,2458.7 v1(3427.4,2503.7) ; 3422.4,1713.7 3422.4,1683.7 3422.4,1672.4 3397.4,1647.4 3397.4,1407.6 3435,1370 3500,1370 ; 3482.4,1713.7 3497.4,1713.7 ; 3912.4,2148.7 3857.4,2148.7
  Bottom Layer w24: v2(865,2290) 815,2240 815,2195 815,1505 1080,1240 1370,1240 1465,1335 1745,1335 1820,1260 2055,1260 2115,1260 ; v2(1025,2095) 1025,1957.5 1010,1942.5 955,1887.5 955,1565 1155,1365 1205,1365 1255,1365 ; v2(1060,1610) 1185,1485 1220,1485 1320,1485 1380,1425 1880,1425 ; 1480,3125 1480,3165 ; 1825,1890 2120,1890 ; 1915,1365 1880,1400 1880,1650 1950,1720 1995,1765 2365,1765 ; 2115,1220 2115,1260 ; 2365,1790 2365,1650 2485,1530 2825,1530 ; 2390,1225 2445,1225 2490,1180 2490,1140 2520,1110 3065,1110 3081.3,1093.7 3367.4,1093.7 3612.4,1093.7 3690,1171.3 3690,1250 3795,1355 3865,1355 3925,1415 3925,1755 3880,1800 3741.3,1938.7 3737.4,1938.7 ; 2655,1645 2655,1535 2660,1530 ; 2695,1395 2575,1395 2525,1345 2210,1345 2155,1345 2115,1305 2115,1260 ; 2826,1530 3182,1174 3264,1174 3295,1205 3410,1205 3445,1170 3500,1170 ; 3175,1185 3190,1170 ; 3360,1095 v1(3360,1140)
  Bottom Layer w36: v2(1295,2840) 1340,2840 1435,2935 1755,2935 1785,2935 1915,2805 1915,2685 1935,2705 2025,2705 2220,2705 ; 1395,2635 1395,2400 ; 1615,1520 1600,1520 1640,1520 1710,1590 1710,1620 1825,1735 1825,2270 ; 1866.4,3159.7 1369.7,3159.7 1135,2925 1135,2785 1220,2700 1330,2700 1410,2620 1740,2620 1825,2535 1825,2270 ; 2230,2320 2155,2320 2141.36,2306.36 2105,2270 1825,2270 ; 3500,1170 3593.7,1170 3627.4,1203.7 3627.4,1267.4 3758.7,1398.7 3800,1440 ; 1395,2400 1370,2375 1395,2400
  other v1: 3342.4,2068.7 3059.06,2318.9 2915,2465 3077.4,2468.7

## Polygon pours and split planes (outlines as drawn)
GND on Bottom Layer "gnd_plane" (solid, remove dead copper, pour order 3): 728.35,3248.03 3877.95,3248.03 cw(c3877.95,3129.92) 3996.06,3129.92 3996.06,1161.42 cw(c3877.95,1161.42) 3877.95,1043.31 728.35,1043.31 cw(c728.35,1161.42) 610.24,1161.42 610.24,3129.92 cw(c728.35,3129.92) 728.35,3248.03

## Keep-outs
M2: Outline:
  the board outline again, w10

## Silkscreen, mask and mechanical layers (free items; w line width, h text height)
Top Overlay:
  circle w15: c3858.27,1181.1 r106.3
  circle w15: c1574.8,1181.1 r106.3
  lines w10: 2217.4,3009.7 2217.4,3209.7 ; 2717.4,3009.7 2717.4,3209.7 ; 3217.4,3009.7 3217.4,3208.7
  text "Vcc" at 3687.4,2003.7 h40
  text "1    2    3    4    5    6    G  8~30v" at 1820,1770 h67 r90

## Dimensions
610.24,1161.42 to 3996.06,1161.42 on Drill Drawing
728.35,3248.03 to 728.35,1043.31 on Drill Drawing